# Altium PCB PCB1.PcbDoc (part 2 of 7)
Units mil, origin at the board's own origin, x right, y up, seen from the top; angles counter-clockwise.
Board outline 2100 x 2700 mil, 6 copper layers (Top Layer, Layer 2, Layer 3, Layer 4, Layer 5, Bottom Layer), stack 32.112 mil thick; 200 components, 319 nets, 1280 pads, 807 vias.
Unrouted connection lines stored in the file: 4.
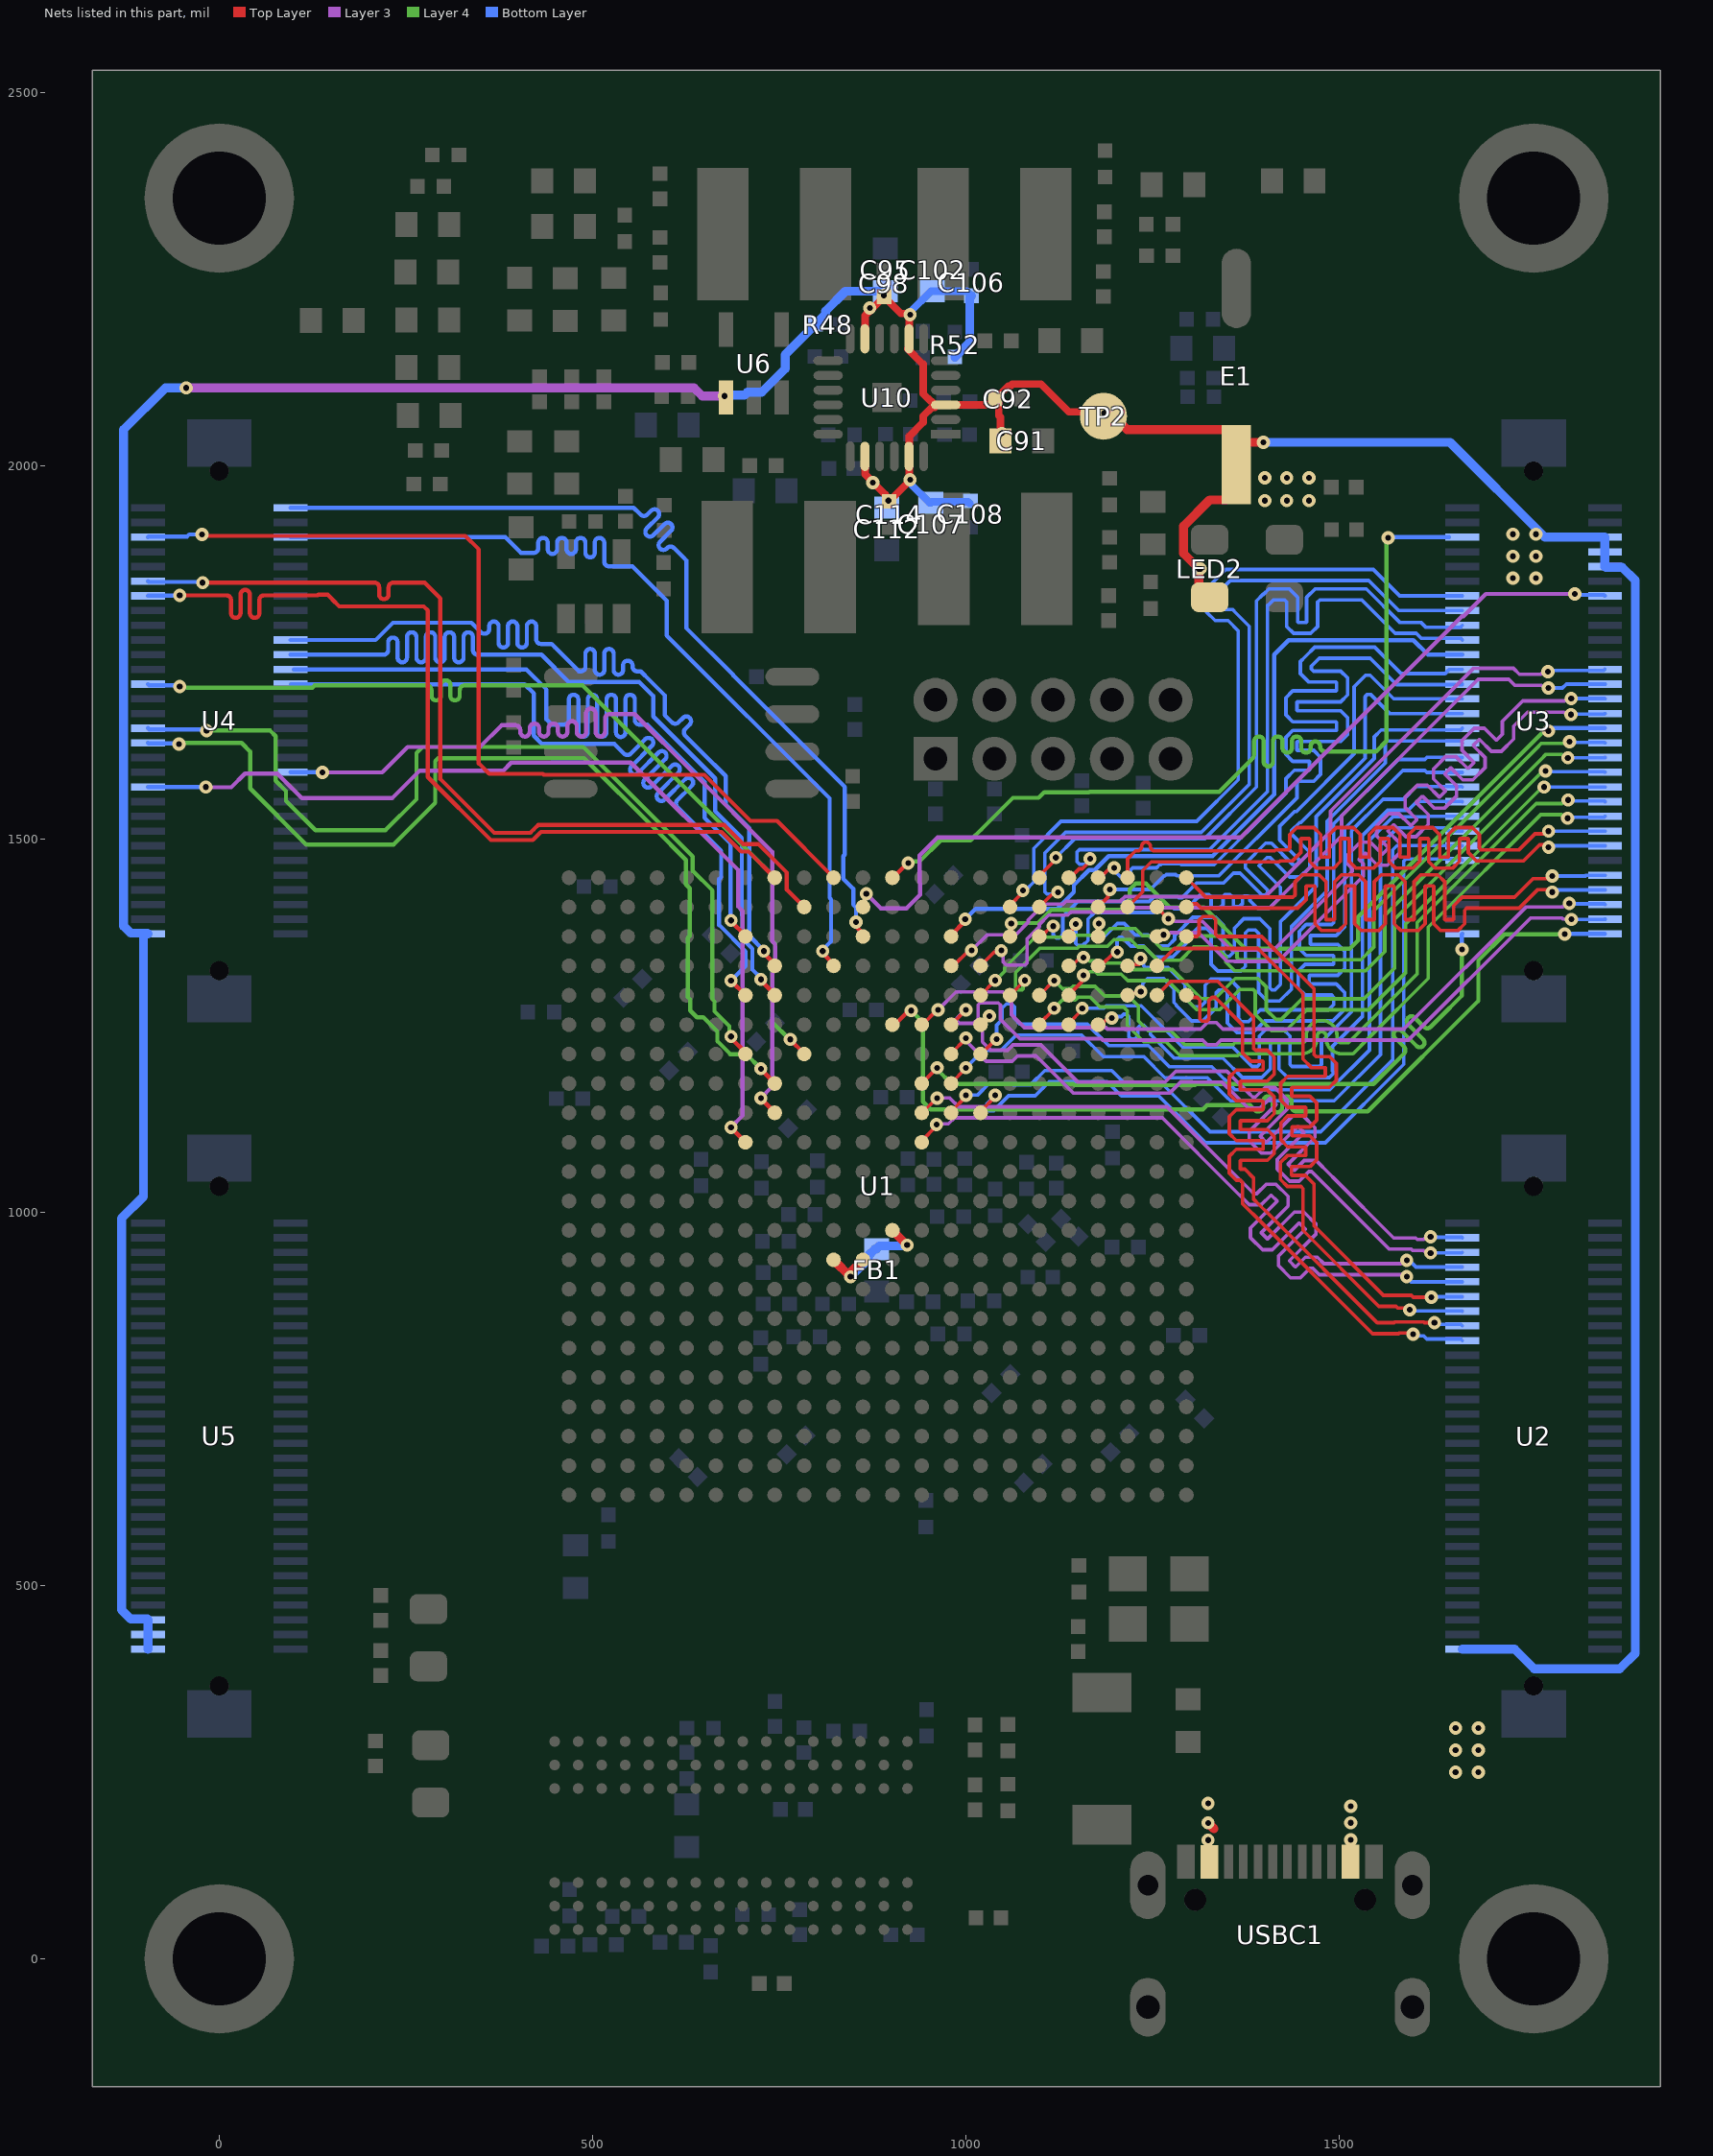
[diagram p6: the nets of this part, all layers, seen from the top]

## Via types
v1: diameter 17.7, hole 7.9, Top Layer to Bottom Layer, tented both sides, 807 vias

## Nets (pads, with @x,y where several pads share a name; then routed paths per layer and width w, separated by ;. In a path a pad name is that pad's centre, name@x,y a point inside that pad or via, vN(x,y) a via of type N, cw(c..) or ccw(c..) an arc to the next point about the centre after c; other vN are vias at no path point) (continued)
+5: C91.2 C92.2 C95.2 C98.2 C102.2 C106.2 C107.2 C108.2 C112.2 C114.2 E1.1 LED2.1 R48.2 R52.2 TP2.1 U2.1 U3.52 U3.54 U3.56 U4.1 U5.1 U5.3 U5.5 U6.1 U10.3 U10.8 U10.11 U10.20 U10.23 USBC1.A4 USBC1.A9 USBC1.B4 USBC1.B9 | length 6684.6
  Top Layer w10: U10.20@864.47,2012.26 864.82,2011.91 864.82,1988.18 892.16,1960.84 892.16,1956.84 v1(896,1953) 898,1953 v1@925,1980 ; U10.11@864.47,2169.74 864.82,2170.09 864.82,2200.82 C98.2@890,2226 ; v1(890,2228) C98.2@890,2226 ; U10.8@922,2156 942.37,2135.63 942.37,2096.35 952.79,2085.94 953.69,2085.94 958.47,2081.16 U10.3@972.74,2081.16 1031.16,2081.16 1036,2086 C92.2@1039,2086 ; U10.8@923.18,2170.09 U10.8@923.53,2169.74 ; U10.23@923.53,2012.26 923.87,2012.61 923.87,2039.25 942.37,2057.74 942.37,2065.96 954.41,2078 U10.3@958,2078 ; U10.23@924,2010 923.87,2009.87 923.87,1982.13 v1(925,1981) ; U10.8@924,2168 923.87,2168.13 923.87,2200.87 v1(925,2202) ; v1@926,2204 925.47,2203.47 912.53,2203.47 C98.2@890,2226 ; C92.2@1040.5,2087.5 1043.84,2084.16 1043.84,2066.89 1046,2064.73 C91.2@1046,2033 C91.2@1046,2030 ; C92.2@1042,2093 1043,2093 1056.53,2106.53 1059.55,2106.53 1062.02,2109 1100.33,2109 1137.5,2071.83 TP2.1@1178.17,2071.83
  Top Layer w12: v1(676.44,2093) U6.1@678.41,2091.03 ; TP2.1@1178.17,2071.83 1191.97,2071.83 1215.65,2048.15 1348.31,2048.15 1362,2034.46 E1.1@1362,2017.31 ; v1@1325,181 1331.89,174.11 ; LED2.1@1326.12,1823.6 1325.33,1823.6 1311.64,1837.29 v1(1311.64,1861.6) 1291.12,1882.11 1291.12,1918.68 1326.29,1953.85 1348.31,1953.85 1362,1967.54 E1.1@1362,2001 E1.1@1362,2017.31 ; v1(1398,2031) 1375.69,2031 E1.1@1362,2017.31
  Layer 3 w12: v1(-44.34,2104) 635.53,2104 646.53,2093 v1(676.44,2093)
  Bottom Layer w10: v1(925,1981) 925,1976.03 951.03,1950 C107.2@953,1950 954.36,1951.36 1002.64,1951.36 C108.2@1005,1949 ; v1(925,2202) 925,2205.43 953.03,2233.46 C102.2@955,2233.46 1000.83,2233.46 1005,2229.28 C106.2@1005,2229
  Bottom Layer w12: U5.1@-95.47,414.56 U5.3@-95.47,434.24 U5.5@-95.47,453.93 -96.55,455.01 -118.56,455.01 -131,467.44 -131,991.59 -101.59,1021 -101.59,1371.48 -100.51,1372.56 U4.1@-95.47,1372.56 -96.55,1373.64 -118.56,1373.64 -128.11,1383.18 -128.11,1530.03 -128.11,2047.89 -72,2104 v1(-44.34,2104) ; v1(676.44,2093) 677.53,2094.09 703.08,2094.09 707.26,2098.28 726.28,2098.28 757.71,2129.71 757.71,2148.44 797.27,2188 801,2188 801,2191.73 811.89,2202.62 811.89,2206.89 838.46,2233.46 884.54,2233.46 v1(890,2228) ; R52.2@985,2145.27 998.62,2158.89 998.98,2158.89 1004.84,2164.75 1004.84,2225.13 C106.2@1007,2227.28 ; v1(1398,2031) 1648,2031 1774.95,1904.05 U3.56@1855.47,1904.05 U3.54@1855.47,1884.37 U3.52@1855.47,1864.68 1856.55,1863.6 1878.57,1863.6 1896,1846.17 1896,409.03 1875.24,388.26 1760.73,388.26 1734.44,414.56 U2.1@1664.53,414.56
  other v1: 1324,159 1514.88,159.14 1324,182 1514.88,182.14 1514.88,204.15 1324,208 1655.38,250 1686,250 1655.38,279.41 1686,279.41 1655.38,309 1686,309 1732.38,1849 1763,1849 1313.64,1861.6 1732.38,1878.41 1763,1878.41 1732.38,1908 1763,1908 1400,1953 1429.41,1953 1459,1953 875,1977 1400,1983.62 1429.41,1983.62 1459,1983.62 1048,2043 1185,2070 871,2211
AGND: FB1.1 U1.K9 U1.L9 U1.M10 | length 183.8
  Top Layer w12: U1.K9@822.52,936.15 825.03,933.64 843.39,915.28 v1(845.25,913.41) ; v1@842.2,916.46 U1.L9@861.89,936.15 ; U1.M10@901.26,975.52 v1(920.95,955.83)
  Bottom Layer w12: v1(845.25,913.41) 869.27,937.43 869.27,941.78 878.03,950.54 FB1.1@880,950.54 ; FB1.1@879.77,950.77 883.74,954.74 919.86,954.74 v1(920.95,955.83)
B14_IO0: U1.P20 U3.39 | length 974.5
  Top Layer w5.61: U1.P20@980,1369.22 980,1371.27 998.85,1390.11 v1(998.85,1392.16)
  Bottom Layer w5.61: v1(998.85,1392.16) 1012.69,1406 1121.85,1406 1144.37,1428.52 1144.37,1438.01 1164.56,1458.2 1172.2,1458.2 1190.8,1476.8 1330.03,1476.8 1412.62,1559.38 1412.62,1746.62 1431.96,1765.96 1599.04,1765.96 1618.43,1746.57 U3.39@1664.54,1746.57
B14_IO25: U1.N15 U3.1 | length 995.9
  Top Layer w5.61: U1.N15@940.63,1172.37 940.63,1172.54 961.27,1193.18 v1(961.27,1193.35)
  Layer 4 w5.61: v1(961.27,1193.35) 961.27,1191.11 980.71,1171.66 1143.27,1171.66 1144.93,1170 1306.71,1170 1308.37,1171.66 1545.66,1171.66 1575,1201 1586.43,1212.43 ccw(c1581.97,1216.89) 1586.43,1221.35 1574.14,1233.65 cw(c1578.59,1238.1) 1574.14,1242.56 cw(c1578.59,1238.1) 1583.05,1242.56 1603.05,1222.56 ccw(c1607.51,1227.02) 1611.97,1222.56 ccw(c1607.51,1227.02) 1611.97,1231.48 1591.97,1251.48 cw(c1596.43,1255.94) 1591.97,1260.4 cw(c1596.43,1255.94) 1600.89,1260.4 1613.18,1248.1 ccw(c1617.64,1252.56) 1622.1,1248.1 1633,1259 1664,1290 v1(1664,1352)
  Bottom Layer w5.61: v1(1664,1352) 1664,1372.03 U3.1@1664.53,1372.56
B14_N_L3: U1.V22 U3.41 | length 975.8
  Top Layer w4.77: U1.V22@1137.48,1447.96 1139.49,1447.96 1151.26,1459.73 1155.49,1459.73 1165.92,1470.17 v1(1165.92,1473.36)
  Bottom Layer w4.77: v1(1165.92,1473.36) 1165.92,1472.92 1158.84,1465.84 1152.03,1465.84 1148.52,1469.35 1148.56,1469.4 1148.56,1482.41 1151.64,1485.49 1325.72,1485.49 1403.43,1563.19 1403.43,1812.43 1403.66,1812.66 1404.28,1812.66 1411.62,1820 1426.61,1820 1429.4,1817.21 1429.4,1784.39 1438.64,1775.15 1461.47,1775.15 1470.71,1784.39 1470.71,1817.21 1473.51,1820 1480.22,1820 1529.73,1820 1574.58,1775.15 1602.85,1775.15 1609.28,1768.71 1662.08,1768.71 U3.41@1664.54,1766.26
B14_N_L4: U1.U21 U3.45 | length 1052
  Top Layer w4.77: U1.U21@1098.11,1408.59 1115.54,1426.02 1120.44,1426.02 v1(1122.91,1428.49)
  Bottom Layer w4.77: v1(1122.91,1428.49) 1120.44,1426.02 1109.47,1426.02 1108.29,1426 1105.5,1428.79 1105.5,1481.08 1132.94,1508.53 1314.86,1508.53 1379.27,1572.94 1379.27,1784.62 1361.21,1802.67 1356.89,1807 1339.56,1807 1336.77,1809.79 1336.77,1828.88 1353.89,1846 1539.11,1846 1579.48,1805.63 U3.45@1664.54,1805.63
B14_N_L5: U1.R19 U3.36 | length 1061.9
  Top Layer w4.77: U1.R19@1019.37,1329.85 1037.4,1347.88 1044.59,1347.88 v1(1047.06,1350.35)
  Layer 3 w4.77: v1(1047.06,1350.35) 1049.53,1347.88 1049.53,1335.23 1053.76,1331 1078.8,1331 1081.59,1333.79 1081.59,1365.86 1097.92,1382.19 1097.92,1385.14 1110.56,1397.79 1136.33,1397.79 1140.38,1401.83 1212.83,1401.83 1218.73,1407.74 1406.73,1407.74 1502.7,1503.7 1502.7,1530.78 1685.53,1713.61 1726.65,1713.61 1734.67,1705.58 1770.49,1705.58 1771.66,1704.41 1777.28,1704.41 v1(1779.75,1701.94)
  Bottom Layer w4.77: v1(1779.75,1701.94) 1798.48,1701.94 1803.75,1707.2 U3.36@1855.47,1707.2
B14_N_L6: U1.T20 U3.30 | length 1023.6
  Top Layer w5.61: U1.T20@1058.74,1369.22 1059.6,1370.08 1059.6,1385.6 v1(1060.46,1386.46)
  Layer 4 w5.61: v1(1060.46,1386.46) 1061.27,1387.27 1096.27,1387.27 1114,1405 1212,1405 1219,1412 1219,1432 1227,1440 1241,1440 1272.85,1408.16 1318.66,1408.16 1373.82,1353 1514,1353 1525,1364 1525,1395.43 1771.85,1642.28 1777.51,1642.28 v1(1779.83,1644.6)
  Bottom Layer w5.61: v1(1779.83,1644.6) 1783.1,1644.6 1786.65,1648.15 U3.30@1855.47,1648.15
B14_N_L7: U1.W22 U3.37 | length 1011.3
  Top Layer w4.77: U1.W22@1176.85,1447.96 1179.47,1447.96 1190.18,1458.67 1195.89,1458.67 v1(1198.37,1461.14)
  Bottom Layer w4.77: v1(1198.37,1461.14) 1198.37,1457.64 1207,1449.01 1216.94,1449.01 1220,1452.07 1220,1458.14 1223,1461.14 1254.84,1461.14 1258.88,1465.18 1260.51,1465.18 1262.08,1466.74 1286.52,1466.74 1288.08,1465.18 1332.29,1465.18 1416.33,1549.22 1428.23,1561.12 1428.23,1580.5 1439.68,1591.95 1459.32,1591.95 1459.91,1592.54 1459.91,1603.13 1459.32,1603.72 1437.47,1603.72 1428.23,1612.96 1428.23,1635.79 1437.47,1645.03 1495.39,1645.03 1495.98,1645.62 1495.98,1656.21 1495.39,1656.8 1437.47,1656.8 1428.23,1666.04 1428.23,1688.87 1437.47,1698.11 1495.39,1698.11 1495.98,1698.7 1495.98,1709.29 1495.39,1709.88 1459.07,1709.88 1447.62,1721.32 1447.62,1737.51 1454.33,1744.22 1466.88,1756.77 1547.12,1756.77 1582.46,1721.43 1641.49,1721.43 1644.28,1724.22 1644.28,1724.35 1646.82,1726.89 U3.37@1664.54,1726.89
B14_N_L8: U1.AA21 U3.34 | length 1023
  Top Layer w4.77: U1.AA21@1255.59,1408.59 1255.59,1405.41 1258.01,1405.41 1271,1392.42 v1(1271,1393)
  Layer 3 w4.77: v1(1271,1393) 1271,1391.66 1273.24,1389.42 1316.67,1389.42 1355.26,1350.84 1359.21,1350.84 1359.37,1351 1360,1351 1411.63,1351 1512.09,1451.46 1516.92,1456.3 1516.92,1460.25 1511.48,1465.7 1511.48,1479.13 1527.88,1495.53 1541.31,1495.53 1557.05,1479.8 1557.88,1479.8 1565.37,1487.29 1565.37,1488.12 1549.63,1503.86 1549.63,1517.29 1566.04,1533.69 1579.47,1533.69 1595.21,1517.96 1596.04,1517.96 1603.53,1525.45 1603.53,1526.28 1587.79,1542.02 1587.79,1555.45 1604.2,1571.85 1617.63,1571.85 1633.37,1556.12 1634.2,1556.12 1641.69,1563.61 1641.69,1564.44 1625.95,1580.18 1625.95,1593.61 1642.36,1610.01 1655.79,1610.01 1671.53,1594.28 1672.36,1594.28 1679.85,1601.77 1679.85,1602.6 1664.11,1618.34 1664.11,1631.77 1680.52,1648.17 1693.95,1648.17 1709.69,1632.44 1710.52,1632.44 1718.01,1639.93 1718.01,1640.76 ; 1717.98,1640.79 1717.98,1657.35 1735.81,1675.19 1745.38,1684.76 1758.43,1684.76 1801.06,1684.76 1801.83,1685.53 1807.85,1685.53 v1(1810.32,1688)
  Bottom Layer w4.77: v1(1810.32,1688) 1810.57,1687.76 1855.23,1687.76 U3.34@1855.47,1687.52
B14_N_L9: U1.Y22 U3.16 | length 1010.6
  Top Layer w4.77: U1.Y22@1216.22,1447.96 1216.22,1473.22 1226.77,1483.77 1229.16,1483.77 ccw(c1229.16,1489.66) 1235.04,1489.66 cw(c1240.93,1489.66) 1246.81,1489.66 ccw(c1252.7,1489.66) 1252.7,1483.77 1286,1483.77 1413.12,1483.77 1414.35,1485 1424,1485 1430.71,1485 1433.51,1487.79 1433.51,1505.76 1442.75,1515 1465.58,1515 1474.82,1505.76 1474.82,1475.94 1475.4,1475.35 1486,1475.35 1486.59,1475.94 1486.59,1505.76 1495.83,1515 1518.66,1515 1527.9,1505.76 1527.9,1475.94 1528.48,1475.35 1539.08,1475.35 1539.67,1475.94 1539.67,1505.76 1548.91,1515 1571.74,1515 1580.98,1505.76 1580.98,1475.94 1581.56,1475.35 1592.16,1475.35 1592.75,1475.94 1592.75,1505.76 1601.99,1515 1624.82,1515 1634.06,1505.76 1634.06,1475.94 1634.64,1475.35 1645.24,1475.35 1645.83,1475.94 1645.83,1505.76 1655.07,1515 1677.9,1515 1687.14,1505.76 1687.14,1487.79 1689.93,1485 1703.93,1485 1740,1485 1761.77,1506.77 1777,1506.77 1780,1509.77 v1(1780,1510.24)
  Bottom Layer w4.77: v1(1780,1510.24) 1830.33,1510.24 1830.45,1510.35 U3.16@1855.47,1510.35
B14_N_L10: U1.AB22 U3.10 | length 1009.2
  Top Layer w4.77: U1.AB22@1294.96,1447.96 1294.96,1447.83 1315.15,1427.64 1315.28,1427.64 1321.11,1421.81 1431,1421.81 1437.71,1421.81 1440.51,1424.61 1440.51,1442.57 1449.75,1451.81 1472.58,1451.81 1481.82,1442.57 1481.82,1392.4 1482.4,1391.81 1493,1391.81 1493.59,1392.4 1493.59,1442.57 1502.83,1451.81 1525.66,1451.81 1534.9,1442.57 1534.9,1392.4 1535.48,1391.81 1546.08,1391.81 1546.67,1392.4 1546.67,1442.57 1555.91,1451.81 1578.74,1451.81 1587.98,1442.57 1587.98,1392.4 1588.56,1391.81 1599.16,1391.81 1599.75,1392.4 1599.75,1442.57 1608.99,1451.81 1631.82,1451.81 1641.06,1442.57 1641.06,1392.4 1641.64,1391.81 1652.24,1391.81 1652.83,1392.4 1652.83,1410.37 1664.27,1421.81 1698.91,1421.81 1734.46,1421.81 1759.41,1446.77 1781.53,1446.77 v1(1785,1450.24)
  Bottom Layer w4.77: v1(1785,1450.24) 1829.38,1450.24 1830.45,1451.3 U3.10@1855.47,1451.3
B14_N_L11: U1.V20 U3.31 | length 998.1
  Top Layer w4.77: U1.V20@1137.48,1369.22 1137.48,1372.98 1147,1382.5 v1(1147,1386)
  Bottom Layer w4.77: v1(1147,1386) 1147,1360 1150,1357 1155,1357 1158,1360 1159.38,1360 1163.19,1363.81 1163.19,1392.53 1172.02,1401.35 1251.5,1401.35 1257.89,1407.74 1277.1,1407.74 1278.67,1406.17 1295.06,1406.17 1313.89,1425 1325.21,1425 1328,1422.21 1328,1409.79 1330.79,1407 1339,1407 1344,1412 1344,1422.21 1346.79,1425 1353,1425 1358,1420 1358,1411 1360,1409 1366,1409 1370,1413 1370,1420.46 1372.79,1423.25 1376.75,1423.25 1380,1420 1380,1417 1390,1407 1406,1407 1421,1422 1421,1435 1392,1464 1403,1475 1407,1475 1433,1449 1447,1449 1460,1462 1460,1482 1436,1506 1436,1511.11 1446.54,1521.65 1448.12,1521.65 1534.29,1607.82 1534.29,1690.29 1537.52,1693.52 1541.48,1693.52 1567.17,1667.83 U3.31@1664.53,1667.83
B14_N_L12: U1.W20 U3.29 | length 1003.4
  Top Layer w4.77: U1.W20@1176.85,1369.22 1179.7,1372.07 1175.74,1376.04 1177.31,1376.04 1177.39,1376.11 1177.39,1385.89 v1(1177.93,1386.42)
  Bottom Layer w4.77: v1(1177.93,1386.42) 1176,1384.5 1176,1369.79 1178.79,1367 1183,1367 1202.42,1386.42 1211.77,1386.42 1226.96,1371.23 1243.7,1371.23 1258.3,1356.63 1270.51,1356.63 1279.14,1365.26 1279.14,1371.23 1280.23,1371.23 1303.77,1394.77 1334.23,1394.77 1344,1385 1344,1347 1348.58,1342.42 1352.53,1342.42 1359.23,1349.12 1359.23,1380.23 1371.85,1392.85 1393.36,1392.85 1406.64,1379.57 1406.64,1300.37 1409.47,1297.54 1413.42,1297.54 1421,1305.11 1421,1389 1427.5,1395.5 1468.77,1436.77 1468.77,1529.9 1546.56,1607.68 1546.56,1636.44 1555.8,1645.69 1662.08,1645.69 U3.29@1664.54,1648.15
B14_N_L13: U1.Y19 U3.25 | length 1023.4
  Top Layer w4.77: U1.Y19@1216.22,1329.85 1220.26,1329.85 1222.08,1331.67 1231.88,1331.67 1233.22,1333.01 1233.22,1339.02 v1(1233.7,1339.51)
  Bottom Layer w4.77: v1(1233.7,1339.51) 1233.7,1336.01 1237.84,1331.87 1237.84,1330.11 1240.63,1327.32 1270.57,1327.32 1293,1304.89 1293,1287 1305,1275 1314,1275 1320,1281 1320,1304 1328,1312 1353.32,1312 1364.77,1300.55 1364.77,1259.23 1369,1255 1378.11,1255 1393.95,1270.83 1485.27,1270.83 1492.31,1277.87 1492.31,1281.23 1492.31,1287.94 1489.52,1290.74 1453.86,1290.74 1444.62,1299.98 1444.62,1322.81 1453.86,1332.05 1491.72,1332.05 1492.31,1332.63 1492.31,1343.23 1491.72,1343.82 1455.44,1343.82 1446.2,1353.06 1446.2,1375.89 1455.44,1385.13 1489.52,1385.13 1492.31,1387.92 1492.31,1417 1492.31,1520.15 1578.55,1606.39 1614.39,1606.39 1617,1609 1664.31,1609 U3.25@1664.54,1608.78
B14_N_L14: U1.V19 U3.24 | length 966.6
  Top Layer w4.77: U1.V19@1137.48,1329.85 1141.52,1329.85 v1@1150.3,1338.63
  Layer 4 w4.77: v1(1157.17,1341.11) 1160.67,1341.11 1165.22,1336.56 1179.7,1336.56 1182.62,1333.64 1213.8,1333.64 1222.67,1324.77 1276.12,1324.77 1314.89,1286 1333.6,1286 1360,1312.4 1360.6,1313 1390.61,1313 1402.05,1301.55 1402.05,1270.95 1415,1258 1422,1258 1449.77,1285.77 1532.77,1285.77 1574,1327 1574,1392.5 1772.5,1591 v1(1776,1591)
  Bottom Layer w4.77: v1(1776,1591) 1776.95,1590.05 1854.52,1590.05 U3.24@1855.47,1589.09
B14_N_L15: U1.AB20 U2.49 | length 1011.8
  Top Layer w4.77: U1.AB20@1294.96,1369.22 1309.21,1369.22 1312,1372.01 1312,1391 1317,1396 1330,1396 1334,1392 1334,1372.09 1336.79,1369.29 1395.59,1369.29 1465.77,1299.12 1465.77,1221.87 1465.77,1211.19 1468.56,1208.4 1486.53,1208.4 1495.77,1199.16 1495.77,1176.33 1486.53,1167.09 1436.59,1167.09 1436,1166.5 1436,1155.91 1436.59,1155.32 1460.3,1155.32 1469.54,1146.08 1469.54,1123.25 1460.3,1114.01 1436.82,1114.01 1436.23,1113.42 1436.23,1102.83 1436.82,1102.24 1460.3,1102.24 1469.54,1093 1469.54,1070.17 1460.3,1060.93 1436.36,1060.93 1435.77,1060.34 1435.77,1049.75 1436.36,1049.16 1454.32,1049.16 1465.77,1037.71 1465.77,1024.89 1465.77,981.66 1558.73,888.69 1596.19,888.69 1598.75,886.14 v1(1622.86,886.14)
  Bottom Layer w4.77: v1(1622.86,886.14) 1623.3,886.57 1664.11,886.57 U2.49@1664.54,887
B14_N_L16: U1.W17 U3.19 | length 973.1
  Top Layer w4.77: U1.W17@1176.85,1251.11 1180.89,1251.11 1187.59,1257.81 1193.12,1257.81 v1(1195.2,1259.89)
  Bottom Layer w4.77: v1(1195.2,1259.89) 1197.31,1262 1208,1262 1211.02,1265.02 1214.98,1265.02 1218,1262 1218,1235 1221,1232 1226,1232 1230,1236 1230,1247 1233.52,1250.52 1237.48,1250.52 1246.91,1241.09 1246.91,1238 1278.68,1206.23 1343.68,1206.23 1369.68,1180.23 1383,1180.23 1395.83,1180.23 1407.28,1191.68 1407.28,1229.82 1407.86,1230.4 1418.46,1230.4 1419.05,1229.82 1419.05,1191.68 1430.49,1180.23 1473,1180.23 1486.32,1180.23 1492.86,1186.77 1490.75,1188.88 1490.75,1222.14 1530.62,1262.01 1530.62,1504.28 1564.46,1538.12 1591.84,1538.12 1603.72,1550 1664.26,1550 U3.19@1664.53,1549.72
B14_N_L17: U1.AB18 U2.43 | length 985.5
  Top Layer w4.77: U1.AB18@1294.96,1290.48 1297.81,1287.63 1309.37,1287.63 1313,1284 1313,1258.59 1315.79,1255.79 1322.21,1255.79 1325,1258.59 1325,1283 1329.52,1287.52 1333.48,1287.52 1370,1251 1370,1226.31 1370,1213.48 1381.45,1202.03 1397.06,1202.03 1397.65,1201.45 1397.65,1190.85 1397.06,1190.26 1361.86,1190.26 1352.61,1181.02 1352.61,1158.2 1361.86,1148.96 1397.1,1148.96 1397.69,1148.37 1397.69,1137.77 1397.1,1137.19 1361.86,1137.19 1352.61,1127.94 1352.61,1105.12 1361.86,1095.88 1397.33,1095.88 1397.92,1095.29 1397.92,1084.69 1397.33,1084.11 1361.86,1084.11 1352.61,1074.86 1352.61,1052.04 1361.86,1042.8 1367.21,1042.8 1370,1040 1370,1011.54 1382.15,999.39 1384.54,997 1544.42,837.12 1579.13,837.12 1579.97,837.96 1597.31,837.96 v1(1598.61,836.66)
  Bottom Layer w4.77: v1(1598.61,836.66) 1601.09,834.18 1612.79,834.18 1617,829.97 1662.51,829.97 U2.43@1664.54,827.94
B14_N_L18: U1.U18 U3.20 | length 1029.3
  Top Layer w4.77: U1.U18@1098.11,1290.48 1098.21,1290.48 1118.02,1310.29 v1(1118.13,1310.29)
  Layer 4 w4.77: v1(1118.13,1310.29) 1118.13,1310.12 1129.22,1299.03 1139.94,1299.03 1143.42,1302.5 1172.47,1302.5 1185.57,1289.4 1217.16,1289.4 1230.7,1275.85 1230.7,1256.18 1243.89,1243 1273.94,1243 1292.68,1224.26 1357.49,1224.26 1360,1226.78 1360.22,1227 1439.8,1227 1449.57,1227 ccw(c1449.57,1232.89) 1455.46,1232.89 1455.46,1236 cw(c1476.11,1236) 1496.77,1236 1496.77,1232.89 ccw(c1502.65,1232.89) 1502.65,1227 1512,1227 1538.83,1253.83 1604,1319 1604,1387.89 1763.33,1547.22 1797.72,1547.22 1802.5,1552 v1(1806,1552)
  Bottom Layer w4.77: v1(1806,1552) 1807.14,1550.86 1854.33,1550.86 U3.20@1855.47,1549.72
B14_N_L19: U1.R14 U3.11 | length 1059.3
  Top Layer w4.77: U1.R14@1019.37,1133 1019.37,1134.91 1039.06,1154.6 v1(1039.06,1156.51)
  Bottom Layer w4.77: v1(1039.06,1156.51) 1039.06,1155.98 1028,1144.93 1028,1138.79 1030.79,1136 1037.09,1136 1056.83,1155.74 1092.62,1155.74 1111.6,1174.72 1188.81,1174.72 1199.86,1163.67 1208.09,1155.43 1258,1155.43 1320.54,1092.9 1480.9,1092.9 1586,1198 1586,1470.21 1588.79,1473 1662.51,1473 U3.11@1664.53,1470.98
B14_N_L20: U1.T18 U3.26 | length 1066.6
  Top Layer w4.77: U1.T18@1058.74,1290.48 v1@1078.58,1310.33
  Layer 4 w4.77: v1(1078.58,1310.35) 1076.1,1307.88 1076.1,1299.1 1075,1298 1069,1298 1066.13,1300.87 1066.13,1321.07 1098.6,1353.55 1148.77,1353.55 1151.06,1355.84 1189.07,1355.84 1198.18,1364.95 1220.32,1364.95 1230.12,1355.15 1238.89,1355.15 1256.81,1337.23 1286.79,1337.23 1304.56,1355 1335,1355 1348,1342 1348,1334.68 1359.45,1323.23 1535.12,1323.23 1560.77,1348.88 1560.77,1397.32 1769.69,1606.24 1776.67,1613.21 1797.57,1613.21 1802.38,1608.4 v1(1805.87,1608.4)
  Bottom Layer w4.77: v1(1805.87,1608.4) 1806.06,1608.59 1855.29,1608.59 U3.26@1855.47,1608.78
B14_N_L21: U1.P17 U3.4 | length 1044.6
  Top Layer w4.77: U1.P17@980,1251.11 v1(999.69,1270.8)
  Layer 3 w4.77: v1(999.69,1270.8) 998.8,1270.8 988,1260 988,1255.77 990.79,1252.98 1009.98,1252.98 1016,1259 1016,1277.55 1018.79,1280.34 1043.12,1280.34 1045.91,1277.55 1045.91,1258.2 1071.9,1232.21 1181.16,1232.21 1182.98,1230.39 1316.77,1230.39 1322.9,1224.26 1335.1,1224.26 1341.23,1230.39 1592.28,1230.39 1755.67,1393.78 1797.66,1393.78 1798.63,1392.8 1810.08,1392.8 v1(1810.76,1392.12)
  Bottom Layer w4.77: v1(1810.76,1392.12) 1810.82,1392.18 1855.41,1392.18 U3.4@1855.47,1392.24
B14_N_L22: U1.R16 U3.17 | length 1066.4
  Top Layer w4.77: U1.R16@1019.37,1211.74 1020.06,1211.74 1040.05,1231.74 v1(1040.73,1231.74)
  Bottom Layer w4.77: v1(1040.73,1231.74) 1040.73,1250.48 1048,1257.75 1048,1273 1054,1279 1061,1279 1065,1275 1065,1259 1072.24,1251.76 1162.24,1251.76 1191.07,1222.93 1244.12,1222.93 1272.28,1194.77 1329.12,1194.77 1360.12,1163.77 1486.88,1163.77 1540,1216.89 1540,1466.5 1540.12,1466.63 1540.12,1498.12 1571.35,1529.35 1618,1529.35 1618.69,1530.04 U3.17@1664.53,1530.04
B14_N_L23: U1.N14 U2.53 | length 1038.1
  Top Layer w4.77: U1.N14@940.63,1133 941.05,1133 960.85,1152.8 v1(961.27,1152.8)
  Layer 3 w4.77: v1(961.27,1152.8) 978.2,1152.8 990,1141 1269,1141 1360,1050 1380.5,1029.5 1385.25,1024.75 1389.2,1024.75 1401.9,1037.46 1414.97,1037.46 1431.11,1021.32 1431.11,1008.25 1395.64,972.77 1395.64,971.94 1403.13,964.45 1403.96,964.45 1439.43,999.92 1452.5,999.92 1468.64,983.78 1468.64,970.71 1433.17,935.24 1433.17,934.41 1440.66,926.92 1441.49,926.92 1454.19,939.62 1470.38,939.62 1479,931 1508.97,931 1582.15,931 1586.5,935.36 v1(1590,935.36)
  Bottom Layer w4.77: v1(1590,935.36) 1593.5,935.36 1602.49,926.37 U2.53@1664.54,926.37
B14_N_L24: U1.R17 U2.57 | length 1035.8
  Top Layer w4.77: U1.R17@1019.37,1251.11 1019.45,1251.11 1031.1,1262.76 v1(1031.18,1262.76)
  Layer 3 w4.77: v1(1031.18,1262.76) 1031.18,1262.11 1022,1252.93 1022,1228 1033,1217 1055.68,1217 1062.61,1223.94 1100.06,1223.94 1150,1174 1266,1174 1280.77,1188.77 1349.12,1188.77 1360,1177.89 1378.94,1158.94 1383.69,1154.2 1387.64,1154.2 1400.34,1166.9 1413.41,1166.9 1429.56,1150.76 1429.56,1137.69 1394.08,1102.22 1394.08,1101.38 1401.57,1093.89 1402.4,1093.89 1437.88,1129.37 1450.95,1129.37 1467.09,1113.23 1467.09,1100.16 1431.61,1064.68 1431.61,1063.85 1439.1,1056.36 1439.93,1056.36 1452.64,1069.06 1468.83,1069.06 1487.7,1050.19 1492.44,1045.44 1572.53,965.36 1602.12,965.36 1603.92,963.56 1612.74,963.56 1613.73,964.55 1619.53,964.55 v1(1622,967.02)
  Bottom Layer w4.77: v1(1622,967.02) 1622.64,966.38 1663.89,966.38 U2.57@1664.54,965.74
B14_P_L3: U1.U22 U3.43 | length 973.4
  Top Layer w4.77: U1.U22@1098.11,1447.96 1098.11,1450.41 1120.23,1472.53 v1(1120.23,1474.98)
  Bottom Layer w4.77: v1(1120.23,1474.98) 1145.51,1500.26 1319.61,1500.26 1388.66,1569.31 1388.66,1818.55 1397.54,1827.43 1398.16,1827.43 1405.5,1834.77 1411.62,1834.77 1432.73,1834.77 1444.17,1823.32 1444.17,1790.51 1444.76,1789.92 1455.35,1789.92 1455.94,1790.51 1455.94,1823.32 1467.39,1834.77 1480.22,1834.77 1535.85,1834.77 1580.7,1789.92 1608.96,1789.92 1615.4,1783.48 1662.08,1783.48 U3.43@1664.54,1785.94
B14_P_L4: U1.T21 U3.47 | length 1057.3
  Top Layer w4.77: U1.T21@1058.74,1408.59 1058.74,1411.04 1075.98,1428.28 v1(1075.98,1430.73)
  Bottom Layer w4.77: v1(1075.98,1430.73) 1079.48,1430.73 1090.73,1441.98 1090.73,1487.2 1126.82,1523.3 1308.74,1523.3 1364.5,1579.06 1364.5,1778.5 1350.77,1792.23 1333.45,1792.23 1322,1803.68 1322,1835 1347.77,1860.77 1545.23,1860.77 1580.69,1825.31 U3.47@1664.54,1825.31
B14_P_L5: U1.P19 U3.38 | length 1064
  Top Layer w4.77: U1.P19@980,1329.85 983.14,1329.85 1003.92,1350.63 v1(1007.25,1350.63)
  Layer 3 w4.77: v1(1007.25,1350.63) 1027.88,1371.26 1066.1,1371.26 1083.15,1388.31 1083.15,1391.26 1104.45,1412.56 1130.22,1412.56 1134.26,1416.6 1206.71,1416.6 1212.62,1422.51 1360,1422.51 1400.62,1422.51 1487.94,1509.82 1487.94,1536.9 1492.26,1541.22 1679.42,1728.38 1732.77,1728.38 1740.79,1720.35 1769.74,1720.35 1770.91,1721.53 1776.53,1721.53 v1(1779,1724)
  Bottom Layer w4.77: v1(1779,1724) 1780.44,1725.44 1853.6,1725.44 U3.38@1855.26,1727.1
B14_P_L7: U1.W21 U3.35 | length 1008.4
  Top Layer w4.77: U1.W21@1176.85,1408.59 1190.02,1421.76 1190.02,1429.75 v1(1192.5,1432.22)
  Bottom Layer w4.77: v1(1192.5,1432.22) 1246.81,1432.22 1265,1450.41 1266.63,1450.41 1268.19,1451.97 1280.4,1451.97 1281.96,1450.41 1338.41,1450.41 1437.22,1549.22 1443,1555 1443,1574.38 1445.79,1577.18 1465.44,1577.18 1474.68,1586.42 1474.68,1609.25 1465.44,1618.49 1443.59,1618.49 1443,1619.08 1443,1629.67 1443.59,1630.26 1501.51,1630.26 1510.75,1639.5 1510.75,1662.33 1501.51,1671.57 1443.59,1671.57 1443,1672.16 1443,1682.75 1443.59,1683.34 1501.51,1683.34 1510.75,1692.58 1510.75,1715.41 1501.51,1724.65 1465.19,1724.65 1462.39,1727.44 1462.39,1731.39 1473,1742 1513.14,1742 1541,1742 1576.34,1706.66 1663.99,1706.66 U3.35@1664.54,1707.2
B14_P_L8: U1.AA20 U3.32 | length 1013.9
  Top Layer w4.77: U1.AA20@1255.59,1369.22 1257.73,1371.36 v1(1264.41,1371.36)
  Layer 3 w4.77: v1(1264.41,1371.36) 1266.88,1373.84 1273.29,1373.84 1273.67,1374.21 1311,1374.21 1349.14,1336.07 1359.09,1336.07 1359.37,1335.79 1360,1335.79 1417.93,1335.79 1522.84,1440.7 1532.14,1450 1532.14,1466.55 1526.69,1472 1526.69,1472.83 1534.18,1480.32 1535.01,1480.32 1550.75,1464.58 1564.18,1464.58 1580.58,1480.99 1580.58,1494.42 1564.85,1510.16 1564.85,1510.99 1572.34,1518.48 1573.17,1518.48 1588.91,1502.74 1602.34,1502.74 1618.74,1519.15 1618.74,1532.58 1603.01,1548.32 1603.01,1549.15 1610.5,1556.64 1611.33,1556.64 1627.07,1540.9 1640.5,1540.9 1656.9,1557.31 1656.9,1570.74 1641.17,1586.48 1641.17,1587.31 1648.66,1594.8 1649.49,1594.8 1665.23,1579.06 1678.66,1579.06 1695.06,1595.47 1695.06,1608.9 1679.33,1624.64 1679.33,1625.47 1686.82,1632.96 1687.65,1632.96 1703.39,1617.22 1716.82,1617.22 1733.22,1633.63 1733.22,1647.06 ; 1733.19,1647.1 1733.19,1651.05 1746.57,1664.43 1751.69,1669.54 1800.73,1669.54 1801.5,1668.78 1807.52,1668.78 v1(1809.99,1666.3)
  Bottom Layer w4.77: v1(1809.99,1666.3) 1810.75,1667.07 1854.71,1667.07 U3.32@1855.47,1667.83
B14_P_L9: U1.Y21 U3.14 | length 1010.2
  Top Layer w4.77: U1.Y21@1216.22,1408.59 1236.63,1429 1236.63,1457.63 1248,1469 1419.24,1469 1420.47,1470.23 1424,1470.23 1436.83,1470.23 1448.28,1481.68 1448.28,1499.64 1448.86,1500.23 1459.46,1500.23 1460.05,1499.64 1460.05,1469.82 1469.29,1460.58 1492.12,1460.58 1501.36,1469.82 1501.36,1499.64 1501.94,1500.23 1512.54,1500.23 1513.13,1499.64 1513.13,1469.82 1522.37,1460.58 1545.2,1460.58 1554.44,1469.82 1554.44,1499.64 1555.02,1500.23 1565.62,1500.23 1566.21,1499.64 1566.21,1469.82 1575.45,1460.58 1598.28,1460.58 1607.52,1469.82 1607.52,1499.64 1608.1,1500.23 1618.7,1500.23 1619.29,1499.64 1619.29,1469.82 1628.53,1460.58 1651.36,1460.58 1660.6,1469.82 1660.6,1499.64 1661.18,1500.23 1671.78,1500.23 1672.37,1499.64 1672.37,1481.68 1683.81,1470.23 1703.93,1470.23 1746.12,1470.23 1767.89,1492 1777,1492 1780,1489 v1(1780,1488.53)
  Bottom Layer w4.77: v1(1780,1488.53) 1782.13,1490.67 U3.14@1855.47,1490.67
B14_P_L10: U1.AB21 U3.8 | length 1003.3
  Top Layer w4.77: U1.AB21@1294.96,1408.59 1299,1408.59 1303.28,1412.87 1309.16,1412.87 1314.99,1407.04 1431,1407.04 1443.83,1407.04 1455.28,1418.49 1455.28,1436.45 1455.86,1437.04 1466.46,1437.04 1467.05,1436.45 1467.05,1386.28 1476.29,1377.04 1499.12,1377.04 1508.36,1386.28 1508.36,1436.45 1508.94,1437.04 1519.54,1437.04 1520.13,1436.45 1520.13,1386.28 1529.37,1377.04 1552.2,1377.04 1561.44,1386.28 1561.44,1436.45 1562.02,1437.04 1572.62,1437.04 1573.21,1436.45 1573.21,1386.28 1582.45,1377.04 1605.28,1377.04 1614.52,1386.28 1614.52,1436.45 1615.1,1437.04 1625.7,1437.04 1626.29,1436.45 1626.29,1386.28 1635.53,1377.04 1658.36,1377.04 1667.6,1386.28 1667.6,1404.25 1670.39,1407.04 1698.91,1407.04 1740.57,1407.04 1765.53,1432 1781.53,1432 v1(1785,1428.53)
  Bottom Layer w4.77: v1(1785,1428.53) 1788.08,1431.61 U3.8@1855.47,1431.61
B14_P_L11: U1.U20 U3.33 | length 990.4
  Top Layer w4.77: U1.U20@1098.11,1369.22 1100.47,1369.22 1114.3,1383.05 v1(1116.67,1383.05)
  Bottom Layer w4.77: v1(1116.67,1383.05) 1116.67,1371.19 1120.88,1366.98 1124.84,1366.98 1129.48,1371.62 1129.48,1395.86 1149.74,1416.12 1245.2,1416.12 1251.58,1422.51 1283.22,1422.51 1284.79,1420.94 1288.94,1420.94 1308.77,1440.77 1344.77,1440.77 1358,1454 1366.89,1454 1396.47,1424.42 1400.42,1424.42 1403.58,1427.58 1403.58,1431.53 1374,1461.11 1374,1467 1401.02,1494.02 1408.86,1494.02 1437.47,1465.42 1442.42,1465.42 1445.23,1468.23 1445.23,1472.77 1419.5,1498.5 1420,1499 1420,1517 1439.42,1536.42 1442,1536.42 1519.52,1613.94 1519.52,1703.52 1535,1719 1541,1719 1572.48,1687.52 U3.33@1664.54,1687.52
B14_P_L12: U1.W19 U3.27 | length 991.3
  Top Layer w4.77: U1.W19@1176.85,1329.85 1180.42,1329.85 1198.94,1348.37 v1(1202.44,1348.37)
  Bottom Layer w4.77: v1(1202.44,1348.37) 1202.25,1348.56 1202.25,1365.51 1205.05,1368.31 1209,1368.31 1220.84,1356.46 1237.58,1356.46 1252.18,1341.86 1276.63,1341.86 1293.91,1359.14 1293.91,1364.02 1309.89,1380 1322,1380 1328,1374 1328,1332 1337,1323 1368,1323 1374,1329 1374,1374 1378,1378 1387.21,1378 1391.79,1373.42 1391.79,1294.22 1403.32,1282.69 1419.57,1282.69 1435.85,1298.96 1435.85,1382.85 1483.54,1430.54 1483.54,1523.78 1561.33,1601.57 1561.33,1628.12 1564.12,1630.92 1662.08,1630.92 U3.27@1664.54,1628.46
B14_P_L13: U1.Y18 U3.23 | length 1023.7
  Top Layer w4.77: U1.Y18@1216.22,1290.48 1218.61,1292.87 1231.53,1292.87 v1(1233.92,1295.26)
  Bottom Layer w4.77: v1(1233.92,1295.26) 1236.39,1297.74 1236.39,1305.76 1243.18,1312.55 1264.45,1312.55 1278.23,1298.77 1278.23,1280.88 1281.51,1277.61 1281.51,1276.74 1302.12,1256.12 1317.12,1256.12 1335,1274 1335,1294 1338.23,1297.23 1347.21,1297.23 1350,1294.44 1350,1253.11 1362.88,1240.23 1384.23,1240.23 1400.06,1256.06 1491.26,1256.06 1491.32,1256 1506.16,1270.83 1507.08,1271.76 1507.08,1281.23 1507.08,1294.06 1495.63,1305.51 1459.98,1305.51 1459.39,1306.09 1459.39,1316.69 1459.98,1317.28 1497.84,1317.28 1507.08,1326.52 1507.08,1349.35 1497.84,1358.59 1461.56,1358.59 1460.97,1359.17 1460.97,1369.77 1461.56,1370.36 1495.63,1370.36 1507.08,1381.8 1507.08,1417 1507.08,1514.03 1584.66,1591.61 1614.39,1591.61 1617,1589 1664.45,1589 U3.23@1664.54,1589.09
B14_P_L14: U1.V18 U3.22 | length 982.8
  Top Layer w4.77: U1.V18@1137.48,1290.48 1137.48,1293.21 1139.9,1293.21 1154.69,1308.01 1154.69,1314.76 v1(1157.17,1317.24)
  Layer 4 w4.77: v1(1157.17,1317.24) 1160.67,1317.24 1165.22,1321.79 1173.58,1321.79 1176.5,1318.87 1207.68,1318.87 1216.55,1310 1270,1310 1304.44,1275.56 1308.77,1271.23 1339.72,1271.23 1360,1291.51 1366.72,1298.23 1384.49,1298.23 1387.28,1295.44 1387.28,1264.83 1408.88,1243.23 1428.12,1243.23 1432.44,1247.56 1455.89,1271 1538.89,1271 1588.77,1320.88 1588.77,1386.38 1771.77,1569.38 v1(1774.14,1569.38)
  Bottom Layer w4.77: v1@1774.15,1569.39 U3.22@1855.47,1569.41
B14_P_L15: U1.AA19 U2.47 | length 1016.7
  Top Layer w4.77: U1.AA19@1255.59,1329.85 1278.97,1353.23 1390.77,1353.23 1451,1293 1451,1221.87 1451,1205.08 1462.45,1193.63 1480.41,1193.63 1481,1193.04 1481,1182.45 1480.41,1181.86 1430.47,1181.86 1421.23,1172.62 1421.23,1149.79 1430.47,1140.55 1454.18,1140.55 1454.77,1139.96 1454.77,1129.37 1454.18,1128.78 1430.7,1128.78 1421.46,1119.54 1421.46,1096.71 1430.7,1087.47 1454.18,1087.47 1454.77,1086.88 1454.77,1076.29 1454.18,1075.7 1430.24,1075.7 1421,1066.46 1421,1043.63 1430.24,1034.39 1448.21,1034.39 1451,1031.6 1451,1024.89 1451,975.54 1552.61,873.92 1575.57,873.92 1577.95,871.54 1591.52,871.54 v1(1593.96,869.1)
  Bottom Layer w4.77: v1(1593.96,869.1) 1595.42,867.64 1664.21,867.64 U2.47@1664.54,867.31
B14_P_L16: U1.V17 U3.21 | length 975.1
  Top Layer w4.77: U1.V17@1137.48,1251.11 1137.48,1252.97 1155.64,1271.13 v1(1155.64,1272.99)
  Bottom Layer w4.77: v1(1155.64,1272.99) 1184.63,1272.99 1188.1,1276.47 1234.45,1276.47 1289.92,1221 1357,1221 1383,1195 1389.71,1195 1392.51,1197.79 1392.51,1235.93 1401.75,1245.17 1424.58,1245.17 1433.82,1235.93 1433.82,1197.79 1436.61,1195 1473,1195 1473.19,1195 1475.98,1197.79 1475.98,1228.26 1515.85,1268.12 1515.85,1510.4 1558.34,1552.89 1585.73,1552.89 1602.84,1570 1663.93,1570 U3.21@1664.53,1569.4
B14_P_L17: U1.AA18 U2.45 | length 979
  Top Layer w4.77: U1.AA18@1255.59,1290.48 1274.11,1309 1337,1309 1341.32,1304.68 1348.21,1297.79 1384.77,1261.23 1384.77,1226.31 1384.77,1219.6 1387.56,1216.8 1403.18,1216.8 1412.42,1207.56 1412.42,1184.74 1403.18,1175.49 1367.97,1175.49 1367.39,1174.91 1367.39,1164.31 1367.97,1163.73 1403.22,1163.73 1412.46,1154.48 1412.46,1131.66 1403.22,1122.42 1367.97,1122.42 1367.39,1121.83 1367.39,1111.23 1367.97,1110.65 1403.45,1110.65 1412.69,1101.4 1412.69,1078.58 1403.45,1069.34 1367.97,1069.34 1367.39,1068.75 1367.39,1058.15 1367.97,1057.57 1373.32,1057.57 1384.77,1046.12 1384.77,1017.66 1392.6,1009.83 1405.43,997 1550.53,851.89 1573.01,851.89 1573.85,852.73 1613.15,852.73 1613.92,851.96 v1(1627.2,851.96)
  Bottom Layer w4.77: v1(1627.2,851.96) 1629.37,849.79 1662.37,849.79 U2.45@1664.54,847.63
B14_P_L18: U1.U17 U3.18 | length 1031.4
  Top Layer w4.77: U1.U17@1098.11,1251.11 1098.11,1252.21 1117.8,1271.9 v1(1117.8,1272.99)
  Layer 4 w4.77: v1(1117.8,1272.99) 1117.96,1272.99 1129.22,1284.26 1146.06,1284.26 1149.54,1287.73 1166.35,1287.73 1179.46,1274.63 1211.04,1274.63 1215.93,1269.74 1215.93,1250.07 1237.77,1228.23 1267.83,1228.23 1286.56,1209.49 1360,1209.49 1363.61,1209.49 1366.34,1212.23 1439.8,1212.23 1449.57,1212.23 ccw(c1449.57,1232.89) 1470.23,1232.89 1470.23,1236 cw(c1476.11,1236) 1482,1236 1482,1232.89 ccw(c1502.65,1232.89) 1502.65,1212.23 1518.12,1212.23 1538.83,1232.94 1618.77,1312.88 1618.77,1381.77 1769.45,1532.45 1797.05,1532.45 1801.84,1527.67 v1(1805.33,1527.67)
  Bottom Layer w4.77: v1(1805.33,1527.67) 1806.52,1528.85 1854.28,1528.85 U3.18@1855.47,1530.04
B14_P_L19: U1.P14 U3.13 | length 1069.1
  Top Layer w4.77: U1.P14@980,1133 980,1134.91 999.69,1154.6 v1(999.69,1156.51)
  Bottom Layer w4.77: v1(999.69,1156.51) 1000.18,1157 1015.69,1157 1030.96,1172.27 1061.18,1172.27 1062.95,1170.51 1086.51,1170.51 1105.49,1189.49 1194.92,1189.49 1214.2,1170.2 1264.12,1170.2 1326.65,1107.67 1360,1107.67 1474.78,1107.67 1571.23,1204.12 1571.23,1485.23 1577,1491 1664.2,1491 U3.13@1664.53,1490.67
B14_P_L20: U1.R18 U3.28 | length 1062.3
  Top Layer w4.77: U1.R18@1019.37,1290.48 1019.37,1290.57 1039.06,1310.26 v1(1039.06,1310.35)
  Layer 4 w4.77: v1(1039.06,1310.35) 1039.56,1310.35 1051.36,1322.15 1051.36,1327.19 1092.49,1368.32 1142.65,1368.32 1144.94,1370.61 1182.95,1370.61 1192.06,1379.72 1226.44,1379.72 1236.11,1370.05 1244.88,1370.05 1262.93,1352 1280.67,1352 1298.44,1369.77 1341.12,1369.77 1362.77,1348.12 1362.77,1340.79 1365.56,1338 1529,1338 1546,1355 1546,1403.43 1763.57,1621.01 1770.55,1627.98 1805.98,1627.98 v1(1808,1630)
  Bottom Layer w4.77: v1(1808,1630) 1808.77,1629.23 1854.7,1629.23 U3.28@1855.47,1628.46
B14_P_L21: U1.N17 U3.6 | length 1042.7
  Top Layer w4.77: U1.N17@940.63,1251.11 941.65,1251.11 961.33,1270.8 v1(962.35,1270.8)
  Layer 3 w4.77: v1(962.35,1270.8) 986.66,1295.11 1049.24,1295.11 1060.68,1283.66 1060.68,1264.32 1078.02,1246.98 1187.28,1246.98 1189.1,1245.16 1314.32,1245.16 1322.9,1253.74 1335.1,1253.74 1343.68,1245.16 1360,1245.16 1586.16,1245.16 1749.55,1408.55 1798.74,1408.55 1799.84,1409.65 1800.33,1409.65 1804.3,1413.62 v1(1807.8,1413.62)
  Bottom Layer w4.77: v1(1807.8,1413.62) 1808.65,1412.77 1854.62,1412.77 U3.6@1855.47,1411.93
B14_P_L22: U1.P15 U3.15 | length 1066.2
  Top Layer w4.77: U1.P15@980,1172.37 980,1172.92 999.89,1192.8 v1(999.89,1193.35)
  Bottom Layer w4.77: v1(999.89,1193.35) 1022.95,1216.41 1046.29,1216.41 1066.88,1236.99 1155.01,1236.99 1183.84,1208.16 1238,1208.16 1266.16,1180 1323,1180 1349.56,1153.44 1354,1149 1493,1149 1554.77,1210.77 1554.77,1460.39 1554.89,1460.51 1554.89,1492 1577.47,1514.58 1642.59,1514.58 1646.82,1510.35 U3.15@1664.53,1510.35
B14_P_L23: U1.N13 U2.51 | length 1039.8
  Top Layer w4.77: U1.N13@940.63,1093.63 940.63,1095.6 960.32,1115.29 v1(960.32,1117.26)
  Layer 3 w4.77: v1(960.32,1117.26) 961.37,1118.32 976.32,1118.32 984.23,1126.23 1262.88,1126.23 1360,1029.11 1370.06,1019.06 1374.8,1014.31 1379.13,1009.98 1395.32,1009.98 1408.02,1022.69 1408.85,1022.69 1416.34,1015.2 1416.34,1014.37 1380.86,978.89 1380.86,965.82 1397.01,949.68 1410.08,949.68 1445.55,985.15 1446.38,985.15 1453.87,977.66 1453.87,976.83 1418.4,941.36 1418.4,928.29 1434.54,912.15 1447.61,912.15 1460.31,924.85 1464.26,924.85 1472.88,916.23 1494.2,916.23 1580.74,916.23 1580.84,916.13 1587.53,916.13 v1(1590,913.66)
  Bottom Layer w4.77: v1(1590,913.66) 1590,912.8 1596.12,906.68 U2.51@1664.54,906.68
B14_P_L24: U1.P16 U2.55 | length 1042.7
  Top Layer w4.77: U1.P16@980,1211.74 980,1212.6 999.69,1232.29 v1(999.69,1233.16)
  Layer 3 w4.77: v1(999.69,1233.16) 1002.16,1230.68 1002.16,1226.95 1026.88,1202.23 1061.79,1202.23 1068.73,1209.17 1093.94,1209.17 1143.88,1159.23 1272.12,1159.23 1286.89,1174 1343,1174 1360,1157 1368.5,1148.5 1373.25,1143.75 1377.57,1139.43 1393.76,1139.43 1406.46,1152.13 1407.29,1152.13 1414.79,1144.64 1414.79,1143.81 1379.31,1108.33 1379.31,1095.26 1395.45,1079.12 1408.52,1079.12 1444,1114.6 1444.83,1114.6 1452.32,1107.11 1452.32,1106.28 1416.84,1070.8 1416.84,1057.73 1432.98,1041.59 1446.05,1041.59 1458.76,1054.29 1462.71,1054.29 1477.25,1039.75 1482,1035 1566.41,950.59 1596,950.59 1597.8,948.79 1612.74,948.79 1613.73,947.8 1619.53,947.8 v1(1622,945.32)
  Bottom Layer w4.77: v1(1622,945.32) 1663.81,945.32 U2.55@1664.54,946.05
B15_IO0: U1.J16 U4.35 | length 1279
  Top Layer w5.61: v1(764.57,1231.43) 764.57,1230.87 783.15,1212.3 U1.J16@783.15,1211.74
  Layer 4 w5.61: v1(-53,1704) -53,1702.38 124.54,1702.38 127.52,1705.36 254,1705.36 277.75,1705.36 cw(c277.75,1699.05) 284.06,1699.05 284.06,1691.66 ccw(c290.36,1691.66) 296.67,1691.66 296.67,1706.09 cw(c302.97,1706.09) 309.28,1706.09 309.28,1691.66 ccw(c315.58,1691.66) 321.89,1691.66 321.89,1699.05 cw(c328.19,1699.05) 328.19,1705.36 331,1705.36 486.64,1705.36 658,1534 740.31,1451.69 740.31,1362.99 744.17,1359.13 744.17,1337.49 740.31,1333.62 740.31,1254.58 763.46,1231.43 v1(764.57,1231.43)
  Bottom Layer w5.61: U4.35@-95.46,1707.2 -93.86,1705.6 -54.6,1705.6 v1(-53,1704)
B15_IO25: U1.M17 U3.2 | length 1276
  Top Layer w5.61: U1.M17@901.26,1251.11 904.4,1251.11 923.29,1270 v1(926.43,1270)
  Layer 4 w5.61: v1(926.43,1270) 942.11,1254.32 942.11,1147.89 952.36,1137.64 1317.21,1137.64 1322.75,1143.18 1360,1143.18 1380.63,1143.18 1388.81,1135 1391.61,1135 ccw(c1391.61,1141.3) 1397.92,1141.3 1397.92,1148.7 cw(c1404.22,1148.7) 1410.53,1148.7 1410.53,1139.91 ccw(c1416.83,1139.91) 1423.14,1139.91 1423.14,1148.7 cw(c1429.44,1148.7) 1435.75,1148.7 1435.75,1141.3 ccw(c1442.05,1141.3) 1442.05,1135 1516,1135 1538,1135 1686,1283 1686,1337 1721,1372 1800.96,1372 v1(1801.47,1372.51)
  Bottom Layer w5.61: v1(1801.47,1372.51) U3.2@1855.45,1372.53
B15_N_L1: U1.G13 U4.21 | length 1272.3
  Top Layer w5.61: v1(685.27,1113.32) 685.27,1113.05 704.41,1093.9 U1.G13@704.41,1093.63
  Layer 3 w5.61: v1(-18,1569.34) -17.66,1569 16,1569 34.39,1587.39 77.61,1587.39 110.66,1554.34 231.34,1554.34 268,1591 380,1591 391,1602 551,1602 695,1458 695,1409 700.42,1403.58 700.42,1129.01 685.27,1113.86 v1(685.27,1113.32)
  Bottom Layer w5.61: U4.21@-95.47,1569.4 -95.27,1569.2 -18.14,1569.2 v1(-18,1569.34)
B15_N_L2: U1.G16 U4.29 | length 1266
  Top Layer w5.61: v1(685.27,1235.26) 685.27,1233.07 704.41,1213.93 U1.G16@704.41,1211.74
  Layer 4 w5.61: v1(-17,1645) 68,1645 75.57,1637.43 75.57,1577.57 89.24,1563.9 89.24,1550.78 128.63,1511.39 222.39,1511.39 264,1553 264,1615 272,1623 487.18,1623 597.18,1513 634,1476.18 634,1457.02 660.31,1430.72 660.31,1382.63 660.05,1382.37 660.05,1285.41 663.03,1282.43 663.03,1268.87 682.95,1248.95 682.95,1237.57 v1(685.27,1235.26)
  Bottom Layer w5.61: U4.29@-95.46,1648.15 -93.89,1646.57 -18.57,1646.57 v1(-17,1645)
B15_N_L3: U1.H14 U4.24 | length 1290.3
  Top Layer w5.61: v1(725.15,1152.78) 725.15,1152.2 743.78,1133.58 U1.H14@743.78,1133
  Layer 3 w5.61: v1(138,1589) 218,1589 252,1623 349,1623 378,1652 381.25,1652 396.67,1652 cw(c396.67,1645.7) 402.97,1645.7 402.97,1643.3 ccw(c409.28,1643.3) 415.58,1643.3 415.58,1648.09 cw(c421.89,1648.09) 428.19,1648.09 428.19,1643.3 ccw(c434.5,1643.3) 440.8,1643.3 440.8,1648.09 cw(c447.11,1648.09) 453.41,1648.09 453.41,1643.3 ccw(c459.72,1643.3) 466.02,1643.3 466.02,1651.12 cw(c472.33,1651.12) 478.63,1651.12 478.63,1643.3 ccw(c484.94,1643.3) 491.24,1643.3 491.24,1668.09 cw(c497.55,1668.09) 503.85,1668.09 503.85,1643.3 ccw(c510.16,1643.3) 516.46,1643.3 516.46,1660.7 cw(c522.77,1660.7) 522.77,1667 556,1667 634,1589 740.31,1482.69 740.31,1362.99 744.03,1359.26 744.03,1355.95 744.17,1355.81 744.17,1324.17 740.31,1320.31 740.31,1167.94 v1(725.15,1152.78)
  Bottom Layer w5.61: U4.24@95.47,1589.09 95.52,1589.05 v1(138,1589) v1(138,1589)
B15_N_L4: U1.G18 U4.36 | length 1271.7
  Top Layer w5.61: v1(685.27,1310.17) 685.27,1309.9 704.41,1290.75 U1.G18@704.41,1290.48
  Bottom Layer w5.61: U4.36@95.85,1706.82 409,1706.82 421,1694.82 421,1638 432,1627 529,1627 540,1616 541.98,1614.02 ccw(c546.44,1618.47) 550.9,1614.02 570.27,1633.38 cw(c574.73,1628.93) 579.18,1633.38 cw(c574.73,1628.93) 579.18,1624.47 551.82,1597.1 ccw(c556.27,1592.64) 551.82,1588.18 ccw(c556.27,1592.64) 560.73,1588.18 588.1,1615.55 cw(c592.56,1611.09) 597.02,1615.55 cw(c592.56,1611.09) 597.02,1606.63 569.65,1579.26 ccw(c574.11,1574.81) 569.65,1570.35 ccw(c574.11,1574.81) 578.57,1570.35 605.93,1597.72 cw(c610.39,1593.26) 614.85,1597.72 cw(c610.39,1593.26) 614.85,1588.8 587.48,1561.43 ccw(c591.94,1556.97) 587.48,1552.51 ccw(c591.94,1556.97) 596.4,1552.51 623.77,1579.88 cw(c628.23,1575.43) 632.68,1579.88 cw(c628.23,1575.43) 632.68,1570.97 613.32,1551.6 ccw(c617.77,1547.14) 613.32,1542.68 636,1520 672.1,1483.9 672.1,1448.69 669.34,1445.93 669.34,1384.5 704.75,1349.08 704.75,1329.65 v1(685.27,1310.17)
B15_N_L5: U1.H15 U4.27 | length 1312.1
  Top Layer w5.61: v1(725.15,1192.06) 725.15,1191.53 743.78,1172.9 U1.H15@743.78,1172.37
  Layer 4 w5.61: v1(-54.08,1627) -52.77,1628.31 29.69,1628.31 41.3,1616.7 41.3,1567.3 116.3,1492.3 233.3,1492.3 289,1548 289,1604 293,1608 488.59,1608 583.59,1513 624.89,1471.7 624.89,1438.78 630,1433.68 630,1369.98 627.6,1367.58 627.6,1287.6 630.69,1284.51 630.69,1269.88 639.57,1261 648.17,1261 666.83,1242.33 666.83,1228.98 684.14,1211.67 705.54,1211.67 v1(725.15,1192.06)
  Bottom Layer w5.61: U4.27@-95.46,1628.46 -94.73,1627.73 -54.81,1627.73 v1(-54.08,1627)
B15_N_L6: U1.H18 U4.40 | length 1290
  Top Layer w5.61: v1(725.15,1311.69) 725.15,1310.4 743.78,1291.77 U1.H18@743.78,1290.48
  Bottom Layer w5.61: U4.40@95.47,1746.57 217,1746.57 219.81,1746.57 ccw(c219.81,1752.88) 226.11,1752.88 226.11,1763.21 cw(c232.42,1763.21) 238.72,1763.21 238.72,1742.7 ccw(c245.03,1742.7) 251.33,1742.7 251.33,1770.27 cw(c257.64,1770.27) 263.94,1770.27 263.94,1742.7 ccw(c270.25,1742.7) 276.55,1742.7 276.55,1770.27 cw(c282.86,1770.27) 289.16,1770.27 289.16,1742.7 ccw(c295.47,1742.7) 301.77,1742.7 301.77,1770.27 cw(c308.08,1770.27) 314.38,1770.27 314.38,1742.7 ccw(c320.69,1742.7) 326.99,1742.7 326.99,1770.27 cw(c333.3,1770.27) 339.6,1770.27 339.6,1752.88 ccw(c345.91,1752.88) 345.91,1746.57 361.87,1746.57 431.43,1746.57 467.8,1710.2 562.2,1710.2 581.2,1691.2 581.2,1663.8 664,1581 664,1537 699.72,1501.28 699.72,1397.76 700.42,1397.05 700.42,1366.3 713.86,1352.86 713.86,1324.82 725.15,1313.52 v1(725.15,1311.69)
B15_N_L7: U1.H22 U4.47 | length 1250
  Top Layer w5.61: v1(-53,1826) -6,1826 9.42,1826 cw(c9.42,1819.7) 15.72,1819.7 15.72,1802.3 ccw(c22.03,1802.3) 28.33,1802.3 28.33,1827.09 cw(c34.64,1827.09) 40.94,1827.09 40.94,1802.3 ccw(c47.25,1802.3) 53.55,1802.3 53.55,1819.7 cw(c59.86,1819.7) 59.86,1826 76,1826 131.86,1826 132.83,1826.97 145.16,1826.97 151.34,1820.79 151.34,1820.52 160.52,1811.34 273.66,1811.34 279,1806 279,1582.88 363.59,1498.29 405,1498.29 419.7,1498.29 430.71,1509.31 672.31,1509.31 698.62,1483 708.74,1483 U1.H22@743.78,1447.96
  Bottom Layer w5.61: U4.47@-95.46,1825.31 -95.12,1825.66 -53.34,1825.66 v1(-53,1826)
B15_N_L8: U1.G20 U4.38 | length 1241
  Top Layer w5.61: v1(685.27,1390.78) 685.27,1389.57 704.41,1370.43 U1.G20@704.41,1369.22
  Bottom Layer w5.61: U4.38@99.8,1726.78 411.22,1726.78 438,1700 438,1660 445,1653 459,1653 461.81,1653 ccw(c461.81,1659.3) 468.11,1659.3 468.11,1686.7 cw(c474.42,1686.7) 480.72,1686.7 480.72,1642.91 ccw(c487.03,1642.91) 493.33,1642.91 493.33,1686.7 cw(c499.64,1686.7) 505.94,1686.7 505.94,1642.91 ccw(c512.25,1642.91) 518.55,1642.91 518.55,1686.7 cw(c524.86,1686.7) 531.16,1686.7 531.16,1642.67 ccw(c537.47,1642.67) 543.77,1642.67 543.77,1686.7 cw(c550.08,1686.7) 556.38,1686.7 556.38,1659.3 ccw(c562.69,1659.3) 562.69,1653 573.16,1653 650,1576.16 650,1528 684.72,1493.28 684.72,1391.32 v1(685.27,1390.78)
B15_N_L9: U1.K22 U4.55 | length 1278
  Top Layer w5.61: v1(-23.1,1907.67) -21.18,1905.75 329.25,1905.75 347.39,1887.61 347.39,1601.02 361.37,1587.04 433.14,1587.04 434.38,1585.8 649.47,1585.8 711.27,1524 746.88,1524 822.52,1448.36 U1.K22@822.52,1447.96
  Bottom Layer w5.61: U4.55@-95.46,1904.05 -94.61,1904.9 -43.17,1904.9 -40.4,1907.67 v1(-23.1,1907.67)
B15_N_L10: U1.L21 U3.48 | length 1204.4
  Layer 3 w5.61: v1(866.37,1426.22) 885.59,1407 920.26,1407 938.31,1425.05 938.31,1440.52 937.58,1441.25 937.58,1477.7 961.88,1502 1368,1502 1664,1798 1666,1798 1696,1828 v1(1815,1828)
  Bottom Layer w5.61: v1(1815,1828) 1816.34,1826.66 1854.13,1826.66 U3.48@1855.47,1825.31
B15_N_L11: U1.J21 U4.49 | length 1256.5
  Top Layer w5.61: v1(-22.34,1843) 41,1843 207.74,1843 cw(c207.74,1836.7) 214.04,1836.7 214.04,1827.26 ccw(c220.35,1827.26) 226.65,1827.26 226.65,1836.7 cw(c232.96,1836.7) 232.96,1843 266.59,1843 275,1843 296,1822 296,1580 368.1,1507.9 405,1507.9 416.42,1507.9 421.52,1513 426.94,1518.42 676.08,1518.42 681.5,1513 701.39,1493.11 721.47,1493.11 759.93,1454.65 759.93,1431.81 U1.J21@783.15,1408.59
  Bottom Layer w5.61: U4.49@-95.46,1845 -94.46,1844 -23.34,1844 v1(-22.34,1843)
B15_N_L12: U1.H19 U4.42 | length 1286.8
  Top Layer w5.61: v1(729.02,1349.54) 729.02,1347.07 743.78,1332.31 U1.H19@743.78,1329.85
  Bottom Layer w5.61: U4.42@95.47,1766.26 209.26,1766.26 232.5,1789.5 301.77,1789.5 337.5,1789.5 350.56,1776.44 ccw(c355.02,1780.9) 361.32,1780.9 361.32,1784.7 cw(c367.63,1784.7) 373.93,1784.7 373.93,1762.49 ccw(c380.24,1762.49) 386.54,1762.49 386.54,1784.7 cw(c392.85,1784.7) 399.15,1784.7 399.15,1762.49 ccw(c405.46,1762.49) 411.76,1762.49 411.76,1784.7 cw(c418.07,1784.7) 424.37,1784.7 424.37,1767.3 ccw(c430.68,1767.3) 430.68,1761 445,1761 449.61,1756.39 481.7,1724.3 483.94,1724.3 ccw(c483.94,1730.61) 490.25,1730.61 490.25,1748 cw(c496.55,1748) 502.86,1748 502.86,1726.12 ccw(c509.16,1726.12) 515.47,1726.12 515.47,1748 cw(c521.77,1748) 528.08,1748 528.08,1726.12 ccw(c534.38,1726.12) 540.69,1726.12 540.69,1732.22 cw(c546.99,1732.22) 553.3,1732.22 553.3,1730.61 ccw(c559.6,1730.61) 559.6,1724.3 564.3,1724.3 576.89,1711.72 596.3,1692.3 596.3,1665.7 604,1658 605.98,1656.02 ccw(c610.44,1660.47) 614.9,1656.02 620.89,1662.01 cw(c625.35,1657.55) 629.81,1662.01 cw(c625.35,1657.55) 629.81,1653.09 623.82,1647.1 ccw(c628.28,1642.64) 623.82,1638.18 645.5,1616.5 678,1584 678,1546 709.53,1514.47 709.53,1370.07 729.02,1350.59 v1(729.02,1349.54)
B15_N_L13: U1.K19 U4.56 | length 1275
  Top Layer w5.61: v1(807.86,1349.54) 807.86,1347.02 822.52,1332.36 U1.K19@822.52,1329.85
  Bottom Layer w5.61: U4.56@95.47,1904.05 382.95,1904.05 404,1883 418,1883 420.81,1883 ccw(c420.81,1889.31) 427.11,1889.31 427.11,1896.69 cw(c433.42,1896.69) 439.72,1896.69 439.72,1887.92 ccw(c446.03,1887.92) 452.33,1887.92 452.33,1896.69 cw(c458.64,1896.69) 464.94,1896.69 464.94,1887.92 ccw(c471.25,1887.92) 477.55,1887.92 477.55,1896.69 cw(c483.86,1896.69) 490.16,1896.69 490.16,1883.2 ccw(c496.47,1883.2) 502.77,1883.2 502.77,1896.69 cw(c509.08,1896.69) 515.38,1896.69 515.38,1871.31 ccw(c521.69,1871.31) 521.69,1865 549.61,1865 553.22,1865 599.22,1819 599.22,1772.17 817.22,1554.17 817.22,1420.81 819.15,1418.88 819.15,1362.66 807.86,1351.37 v1(807.86,1349.54)
B15_N_L14: U1.L20 U4.60 | length 1270.3
  Top Layer w5.61: v1(852.52,1388.47) 854.11,1386.89 854.11,1380.81 861.89,1373.03 U1.L20@861.89,1369.22
  Bottom Layer w5.61: U4.60@95.47,1943.42 554.87,1943.42 562.15,1936.15 564.13,1934.16 ccw(c568.59,1938.62) 573.05,1934.16 578.27,1939.39 cw(c582.73,1934.93) 587.19,1939.39 cw(c582.73,1934.93) 587.19,1930.47 572.25,1915.54 ccw(c576.71,1911.08) 572.25,1906.62 ccw(c576.71,1911.08) 581.17,1906.62 596.11,1921.56 cw(c600.57,1917.1) 605.02,1921.56 cw(c600.57,1917.1) 605.02,1912.64 590.09,1897.7 ccw(c594.55,1893.25) 590.09,1888.79 ccw(c594.55,1893.25) 599,1888.79 599.8,1889.58 cw(c604.26,1885.12) 608.71,1889.58 623.15,1875.15 625.3,1873 625.3,1782.3 688.62,1718.97 688.62,1718.36 837.44,1569.54 837.44,1478.72 835.44,1476.72 835.44,1446.4 848.85,1432.99 848.85,1411.72 852.52,1408.04 v1(852.52,1388.47)
B15_N_L15: U1.M22 U3.55 | length 1248.6
  Top Layer w5.61: U1.M22@901.26,1447.96 902,1447.96 921.69,1467.65 v1(922.43,1467.65)
  Layer 4 w5.61: v1(922.43,1467.65) 924.74,1469.96 937.96,1469.96 966,1498 1005.86,1498 1020.86,1513 1062.75,1554.89 1073.19,1554.89 1097.14,1554.88 1104.6,1562.34 1164.48,1562.34 1165.14,1563 1339,1563 1379.85,1603.85 1382.65,1606.65 ccw(c1375.04,1614.26) 1385.81,1614.26 1385.81,1630.7 cw(c1392.11,1630.7) 1398.42,1630.7 1398.42,1603.3 ccw(c1404.72,1603.3) 1411.03,1603.3 1411.03,1630.7 cw(c1417.33,1630.7) 1423.64,1630.7 1423.64,1621.71 ccw(c1429.94,1621.71) 1436.25,1621.71 1436.25,1630.7 cw(c1442.55,1630.7) 1448.86,1630.7 1448.86,1621.71 ccw(c1455.16,1621.71) 1461.47,1621.71 1461.47,1624.13 cw(c1467.77,1624.13) 1474.08,1624.13 1474.08,1623.3 ccw(c1480.38,1623.3) 1480.38,1617 1541,1617 1549,1617 1563,1631 1563,1901 v1(1565,1903)
  Bottom Layer w5.61: v1@1565,1904.05 U3.55@1646.82,1904.05